# EAGLE board HIH6130_Breakout-Panel-v11 (EAGLE 6.5.0), part 1 of 2
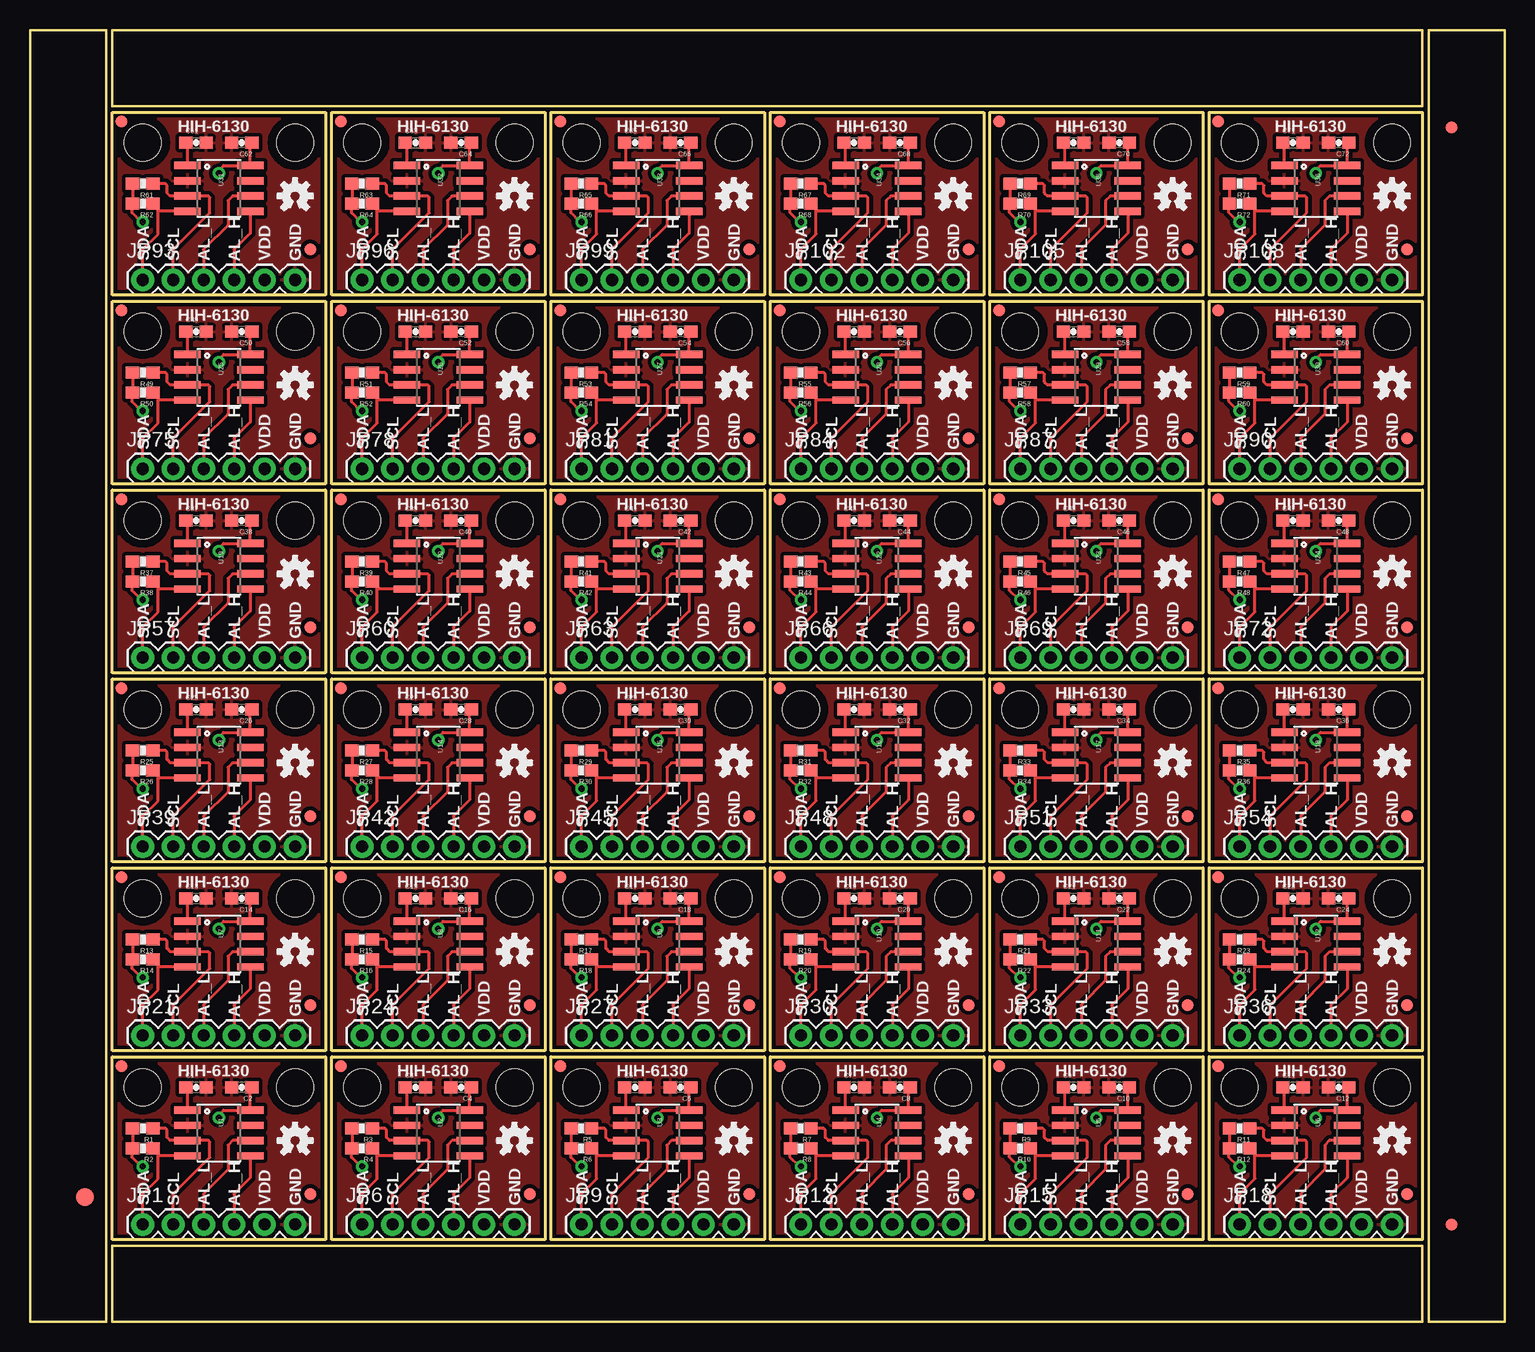
[diagram p0: board, top side]
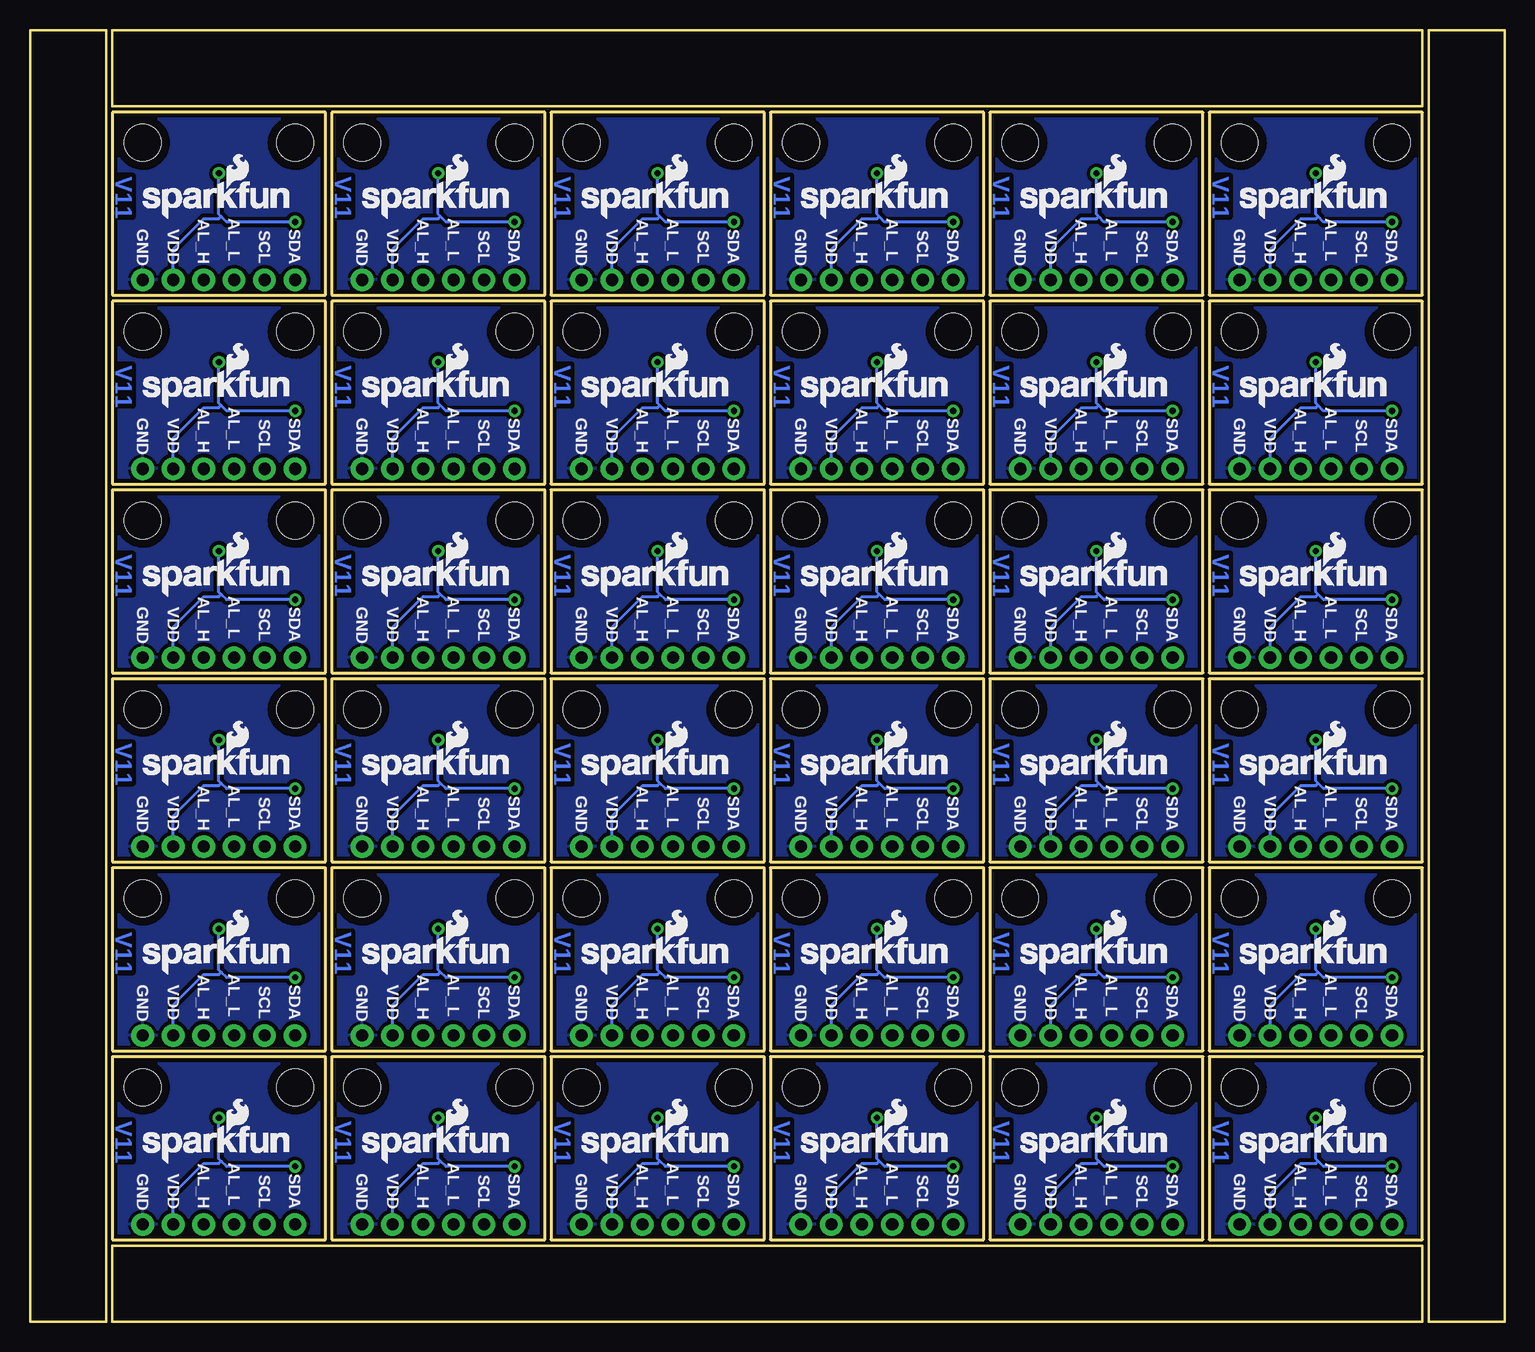
[diagram p1: board, bottom side, seen from below]

Size 122.94 x 107.7 mm. Coordinates in mm from the lower left corner, seen from the top.
Outline: 164 segments
Copper layers (1*16): Top 0.035mm / dielectric 1.5mm / Bottom 0.035mm
Design rules "SparkFun": minimum track width 8mil, minimum drill 20mil, track to track 8mil, track to pad 8mil, pad to pad 8mil, via to via 8mil, smd to smd 8mil, copper to edge 8mil, drill to drill 8mil, minimum pad ring 12mil, minimum via ring 10mil, stop-mask expansion 4mil, vias tented up to drill 20mil, thermal gap 10mil
Net classes: 0 Default: width 0.203 mm; 1 vcc: width 0.254 mm; 2 GND: width 0.813 mm

## Footprints (pad centres in the part's own frame; a part is rotated, then mirrored left to right if it is on the bottom)
0603-CAP = smd 1.1 x 1: 1 -0.85,0; 2 0.85,0
FIDUCIAL-1.5X3 = smd 1.5 x 1.5: 1 0,0
FIDUCIAL-1X2 = smd 1 x 1: 1 0,0
1X06 = drill 1.016 pad 1.88: 1 0,0; 2 2.54,0; 3 5.08,0; 4 7.62,0; 5 10.16,0; 6 12.7,0
STAND-OFF-TIGHT = hole 3.048: 0,0
0603-RES = smd 1.1 x 1: 1 -0.85,0; 2 0.85,0
SOIC8 = smd 0.61 x 2.21: 1 -1.905,-2.616; 2 -0.635,-2.616; 3 0.635,-2.616; 4 1.905,-2.616; 5 1.905,2.616; 6 0.635,2.616; 7 -0.635,2.616; 8 -1.905,2.616

## Placement (x,y rotation side)
C1  0.1uF  [0603-CAP]  13.84,19.56 0 top
C2  0.22uF  [0603-CAP]  17.65,19.56 180 top
C3  0.1uF  [0603-CAP]  32.13,19.56 0 top
C4  0.22uF  [0603-CAP]  35.94,19.56 180 top
C5  0.1uF  [0603-CAP]  50.42,19.56 0 top
C6  0.22uF  [0603-CAP]  54.23,19.56 180 top
C7  0.1uF  [0603-CAP]  68.71,19.56 0 top
C8  0.22uF  [0603-CAP]  72.52,19.56 180 top
C9  0.1uF  [0603-CAP]  87,19.56 0 top
C10  0.22uF  [0603-CAP]  90.81,19.56 180 top
C11  0.1uF  [0603-CAP]  105.28,19.56 0 top
C12  0.22uF  [0603-CAP]  109.09,19.56 180 top
C13  0.1uF  [0603-CAP]  13.84,35.31 0 top
C14  0.22uF  [0603-CAP]  17.65,35.31 180 top
C15  0.1uF  [0603-CAP]  32.13,35.31 0 top
C16  0.22uF  [0603-CAP]  35.94,35.31 180 top
C17  0.1uF  [0603-CAP]  50.42,35.31 0 top
C18  0.22uF  [0603-CAP]  54.23,35.31 180 top
C19  0.1uF  [0603-CAP]  68.71,35.31 0 top
C20  0.22uF  [0603-CAP]  72.52,35.31 180 top
C21  0.1uF  [0603-CAP]  87,35.31 0 top
C22  0.22uF  [0603-CAP]  90.81,35.31 180 top
C23  0.1uF  [0603-CAP]  105.28,35.31 0 top
C24  0.22uF  [0603-CAP]  109.09,35.31 180 top
C25  0.1uF  [0603-CAP]  13.84,51.05 0 top
C26  0.22uF  [0603-CAP]  17.65,51.05 180 top
C27  0.1uF  [0603-CAP]  32.13,51.05 0 top
C28  0.22uF  [0603-CAP]  35.94,51.05 180 top
C29  0.1uF  [0603-CAP]  50.42,51.05 0 top
C30  0.22uF  [0603-CAP]  54.23,51.05 180 top
C31  0.1uF  [0603-CAP]  68.71,51.05 0 top
C32  0.22uF  [0603-CAP]  72.52,51.05 180 top
C33  0.1uF  [0603-CAP]  87,51.05 0 top
C34  0.22uF  [0603-CAP]  90.81,51.05 180 top
C35  0.1uF  [0603-CAP]  105.28,51.05 0 top
C36  0.22uF  [0603-CAP]  109.09,51.05 180 top
C37  0.1uF  [0603-CAP]  13.84,66.8 0 top
C38  0.22uF  [0603-CAP]  17.65,66.8 180 top
C39  0.1uF  [0603-CAP]  32.13,66.8 0 top
C40  0.22uF  [0603-CAP]  35.94,66.8 180 top
C41  0.1uF  [0603-CAP]  50.42,66.8 0 top
C42  0.22uF  [0603-CAP]  54.23,66.8 180 top
C43  0.1uF  [0603-CAP]  68.71,66.8 0 top
C44  0.22uF  [0603-CAP]  72.52,66.8 180 top
C45  0.1uF  [0603-CAP]  87,66.8 0 top
C46  0.22uF  [0603-CAP]  90.81,66.8 180 top
C47  0.1uF  [0603-CAP]  105.28,66.8 0 top
C48  0.22uF  [0603-CAP]  109.09,66.8 180 top
C49  0.1uF  [0603-CAP]  13.84,82.55 0 top
C50  0.22uF  [0603-CAP]  17.65,82.55 180 top
C51  0.1uF  [0603-CAP]  32.13,82.55 0 top
C52  0.22uF  [0603-CAP]  35.94,82.55 180 top
C53  0.1uF  [0603-CAP]  50.42,82.55 0 top
C54  0.22uF  [0603-CAP]  54.23,82.55 180 top
C55  0.1uF  [0603-CAP]  68.71,82.55 0 top
C56  0.22uF  [0603-CAP]  72.52,82.55 180 top
C57  0.1uF  [0603-CAP]  87,82.55 0 top
C58  0.22uF  [0603-CAP]  90.81,82.55 180 top
C59  0.1uF  [0603-CAP]  105.28,82.55 0 top
C60  0.22uF  [0603-CAP]  109.09,82.55 180 top
C61  0.1uF  [0603-CAP]  13.84,98.3 0 top
C62  0.22uF  [0603-CAP]  17.65,98.3 180 top
C63  0.1uF  [0603-CAP]  32.13,98.3 0 top
C64  0.22uF  [0603-CAP]  35.94,98.3 180 top
C65  0.1uF  [0603-CAP]  50.42,98.3 0 top
C66  0.22uF  [0603-CAP]  54.23,98.3 180 top
C67  0.1uF  [0603-CAP]  68.71,98.3 0 top
C68  0.22uF  [0603-CAP]  72.52,98.3 180 top
C69  0.1uF  [0603-CAP]  87,98.3 0 top
C70  0.22uF  [0603-CAP]  90.81,98.3 180 top
C71  0.1uF  [0603-CAP]  105.28,98.3 0 top
C72  0.22uF  [0603-CAP]  109.09,98.3 180 top
E$1  [FIDUCIAL-1.5X3]  4.57,10.41 0 top
E$4  [FIDUCIAL-1X2]  118.49,8.13 0 top
E$6  [FIDUCIAL-1X2]  118.49,99.57 180 top
FID1  FIDUCIAL1X2  [FIDUCIAL-1X2]  7.62,21.34 0 top
FID2  FIDUCIAL1X2  [FIDUCIAL-1X2]  23.37,10.67 0 top
FID3  FIDUCIAL1X2  [FIDUCIAL-1X2]  25.91,21.34 0 top
FID4  FIDUCIAL1X2  [FIDUCIAL-1X2]  41.66,10.67 0 top
FID5  FIDUCIAL1X2  [FIDUCIAL-1X2]  44.2,21.34 0 top
FID6  FIDUCIAL1X2  [FIDUCIAL-1X2]  59.94,10.67 0 top
FID7  FIDUCIAL1X2  [FIDUCIAL-1X2]  62.48,21.34 0 top
FID8  FIDUCIAL1X2  [FIDUCIAL-1X2]  78.23,10.67 0 top
FID9  FIDUCIAL1X2  [FIDUCIAL-1X2]  80.77,21.34 0 top
FID10  FIDUCIAL1X2  [FIDUCIAL-1X2]  96.52,10.67 0 top
FID11  FIDUCIAL1X2  [FIDUCIAL-1X2]  99.06,21.34 0 top
FID12  FIDUCIAL1X2  [FIDUCIAL-1X2]  114.81,10.67 0 top
FID13  FIDUCIAL1X2  [FIDUCIAL-1X2]  7.62,37.08 0 top
FID14  FIDUCIAL1X2  [FIDUCIAL-1X2]  23.37,26.42 0 top
FID15  FIDUCIAL1X2  [FIDUCIAL-1X2]  25.91,37.08 0 top
FID16  FIDUCIAL1X2  [FIDUCIAL-1X2]  41.66,26.42 0 top
FID17  FIDUCIAL1X2  [FIDUCIAL-1X2]  44.2,37.08 0 top
FID18  FIDUCIAL1X2  [FIDUCIAL-1X2]  59.94,26.42 0 top
FID19  FIDUCIAL1X2  [FIDUCIAL-1X2]  62.48,37.08 0 top
FID20  FIDUCIAL1X2  [FIDUCIAL-1X2]  78.23,26.42 0 top
FID21  FIDUCIAL1X2  [FIDUCIAL-1X2]  80.77,37.08 0 top
FID22  FIDUCIAL1X2  [FIDUCIAL-1X2]  96.52,26.42 0 top
FID23  FIDUCIAL1X2  [FIDUCIAL-1X2]  99.06,37.08 0 top
FID24  FIDUCIAL1X2  [FIDUCIAL-1X2]  114.81,26.42 0 top
FID25  FIDUCIAL1X2  [FIDUCIAL-1X2]  7.62,52.83 0 top
FID26  FIDUCIAL1X2  [FIDUCIAL-1X2]  23.37,42.16 0 top
FID27  FIDUCIAL1X2  [FIDUCIAL-1X2]  25.91,52.83 0 top
FID28  FIDUCIAL1X2  [FIDUCIAL-1X2]  41.66,42.16 0 top
FID29  FIDUCIAL1X2  [FIDUCIAL-1X2]  44.2,52.83 0 top
FID30  FIDUCIAL1X2  [FIDUCIAL-1X2]  59.94,42.16 0 top
FID31  FIDUCIAL1X2  [FIDUCIAL-1X2]  62.48,52.83 0 top
FID32  FIDUCIAL1X2  [FIDUCIAL-1X2]  78.23,42.16 0 top
FID33  FIDUCIAL1X2  [FIDUCIAL-1X2]  80.77,52.83 0 top
FID34  FIDUCIAL1X2  [FIDUCIAL-1X2]  96.52,42.16 0 top
FID35  FIDUCIAL1X2  [FIDUCIAL-1X2]  99.06,52.83 0 top
FID36  FIDUCIAL1X2  [FIDUCIAL-1X2]  114.81,42.16 0 top
FID37  FIDUCIAL1X2  [FIDUCIAL-1X2]  7.62,68.58 0 top
FID38  FIDUCIAL1X2  [FIDUCIAL-1X2]  23.37,57.91 0 top
FID39  FIDUCIAL1X2  [FIDUCIAL-1X2]  25.91,68.58 0 top
FID40  FIDUCIAL1X2  [FIDUCIAL-1X2]  41.66,57.91 0 top
FID41  FIDUCIAL1X2  [FIDUCIAL-1X2]  44.2,68.58 0 top
FID42  FIDUCIAL1X2  [FIDUCIAL-1X2]  59.94,57.91 0 top
FID43  FIDUCIAL1X2  [FIDUCIAL-1X2]  62.48,68.58 0 top
FID44  FIDUCIAL1X2  [FIDUCIAL-1X2]  78.23,57.91 0 top
FID45  FIDUCIAL1X2  [FIDUCIAL-1X2]  80.77,68.58 0 top
FID46  FIDUCIAL1X2  [FIDUCIAL-1X2]  96.52,57.91 0 top
FID47  FIDUCIAL1X2  [FIDUCIAL-1X2]  99.06,68.58 0 top
FID48  FIDUCIAL1X2  [FIDUCIAL-1X2]  114.81,57.91 0 top
FID49  FIDUCIAL1X2  [FIDUCIAL-1X2]  7.62,84.33 0 top
FID50  FIDUCIAL1X2  [FIDUCIAL-1X2]  23.37,73.66 0 top
FID51  FIDUCIAL1X2  [FIDUCIAL-1X2]  25.91,84.33 0 top
FID52  FIDUCIAL1X2  [FIDUCIAL-1X2]  41.66,73.66 0 top
FID53  FIDUCIAL1X2  [FIDUCIAL-1X2]  44.2,84.33 0 top
FID54  FIDUCIAL1X2  [FIDUCIAL-1X2]  59.94,73.66 0 top
FID55  FIDUCIAL1X2  [FIDUCIAL-1X2]  62.48,84.33 0 top
FID56  FIDUCIAL1X2  [FIDUCIAL-1X2]  78.23,73.66 0 top
FID57  FIDUCIAL1X2  [FIDUCIAL-1X2]  80.77,84.33 0 top
FID58  FIDUCIAL1X2  [FIDUCIAL-1X2]  96.52,73.66 0 top
FID59  FIDUCIAL1X2  [FIDUCIAL-1X2]  99.06,84.33 0 top
FID60  FIDUCIAL1X2  [FIDUCIAL-1X2]  114.81,73.66 0 top
FID61  FIDUCIAL1X2  [FIDUCIAL-1X2]  7.62,100.08 0 top
FID62  FIDUCIAL1X2  [FIDUCIAL-1X2]  23.37,89.41 0 top
FID63  FIDUCIAL1X2  [FIDUCIAL-1X2]  25.91,100.08 0 top
FID64  FIDUCIAL1X2  [FIDUCIAL-1X2]  41.66,89.41 0 top
FID65  FIDUCIAL1X2  [FIDUCIAL-1X2]  44.2,100.08 0 top
FID66  FIDUCIAL1X2  [FIDUCIAL-1X2]  59.94,89.41 0 top
FID67  FIDUCIAL1X2  [FIDUCIAL-1X2]  62.48,100.08 0 top
FID68  FIDUCIAL1X2  [FIDUCIAL-1X2]  78.23,89.41 0 top
FID69  FIDUCIAL1X2  [FIDUCIAL-1X2]  80.77,100.08 0 top
FID70  FIDUCIAL1X2  [FIDUCIAL-1X2]  96.52,89.41 0 top
FID71  FIDUCIAL1X2  [FIDUCIAL-1X2]  99.06,100.08 0 top
FID72  FIDUCIAL1X2  [FIDUCIAL-1X2]  114.81,89.41 0 top
JP1  [1X06]  9.4,8.13 0 top
JP2  STAND-OFFTIGHT  [STAND-OFF-TIGHT]  27.69,19.56 0 top
JP3  STAND-OFFTIGHT  [STAND-OFF-TIGHT]  9.4,19.56 0 top
JP4  STAND-OFFTIGHT  [STAND-OFF-TIGHT]  22.1,19.56 0 top
JP5  STAND-OFFTIGHT  [STAND-OFF-TIGHT]  40.39,19.56 0 top
JP6  [1X06]  27.69,8.13 0 top
JP7  STAND-OFFTIGHT  [STAND-OFF-TIGHT]  45.97,19.56 0 top
JP8  STAND-OFFTIGHT  [STAND-OFF-TIGHT]  58.67,19.56 0 top
JP9  [1X06]  45.97,8.13 0 top
JP10  STAND-OFFTIGHT  [STAND-OFF-TIGHT]  64.26,19.56 0 top
JP11  STAND-OFFTIGHT  [STAND-OFF-TIGHT]  76.96,19.56 0 top
JP12  [1X06]  64.26,8.13 0 top
JP13  STAND-OFFTIGHT  [STAND-OFF-TIGHT]  82.55,19.56 0 top
JP14  STAND-OFFTIGHT  [STAND-OFF-TIGHT]  95.25,19.56 0 top
JP15  [1X06]  82.55,8.13 0 top
JP16  STAND-OFFTIGHT  [STAND-OFF-TIGHT]  100.84,19.56 0 top
JP17  STAND-OFFTIGHT  [STAND-OFF-TIGHT]  113.54,19.56 0 top
JP18  [1X06]  100.84,8.13 0 top
JP19  STAND-OFFTIGHT  [STAND-OFF-TIGHT]  9.4,35.31 0 top
JP20  STAND-OFFTIGHT  [STAND-OFF-TIGHT]  22.1,35.31 0 top
JP21  [1X06]  9.4,23.88 0 top
JP22  STAND-OFFTIGHT  [STAND-OFF-TIGHT]  27.69,35.31 0 top
JP23  STAND-OFFTIGHT  [STAND-OFF-TIGHT]  40.39,35.31 0 top
JP24  [1X06]  27.69,23.88 0 top
JP25  STAND-OFFTIGHT  [STAND-OFF-TIGHT]  45.97,35.31 0 top
JP26  STAND-OFFTIGHT  [STAND-OFF-TIGHT]  58.67,35.31 0 top
JP27  [1X06]  45.97,23.88 0 top
JP28  STAND-OFFTIGHT  [STAND-OFF-TIGHT]  64.26,35.31 0 top
JP29  STAND-OFFTIGHT  [STAND-OFF-TIGHT]  76.96,35.31 0 top
JP30  [1X06]  64.26,23.88 0 top
JP31  STAND-OFFTIGHT  [STAND-OFF-TIGHT]  82.55,35.31 0 top
JP32  STAND-OFFTIGHT  [STAND-OFF-TIGHT]  95.25,35.31 0 top
JP33  [1X06]  82.55,23.88 0 top
JP34  STAND-OFFTIGHT  [STAND-OFF-TIGHT]  100.84,35.31 0 top
JP35  STAND-OFFTIGHT  [STAND-OFF-TIGHT]  113.54,35.31 0 top
JP36  [1X06]  100.84,23.88 0 top
JP37  STAND-OFFTIGHT  [STAND-OFF-TIGHT]  9.4,51.05 0 top
JP38  STAND-OFFTIGHT  [STAND-OFF-TIGHT]  22.1,51.05 0 top
JP39  [1X06]  9.4,39.62 0 top
JP40  STAND-OFFTIGHT  [STAND-OFF-TIGHT]  27.69,51.05 0 top
JP41  STAND-OFFTIGHT  [STAND-OFF-TIGHT]  40.39,51.05 0 top
JP42  [1X06]  27.69,39.62 0 top
JP43  STAND-OFFTIGHT  [STAND-OFF-TIGHT]  45.97,51.05 0 top
JP44  STAND-OFFTIGHT  [STAND-OFF-TIGHT]  58.67,51.05 0 top
JP45  [1X06]  45.97,39.62 0 top
JP46  STAND-OFFTIGHT  [STAND-OFF-TIGHT]  64.26,51.05 0 top
JP47  STAND-OFFTIGHT  [STAND-OFF-TIGHT]  76.96,51.05 0 top
JP48  [1X06]  64.26,39.62 0 top
JP49  STAND-OFFTIGHT  [STAND-OFF-TIGHT]  82.55,51.05 0 top
JP50  STAND-OFFTIGHT  [STAND-OFF-TIGHT]  95.25,51.05 0 top
JP51  [1X06]  82.55,39.62 0 top
JP52  STAND-OFFTIGHT  [STAND-OFF-TIGHT]  100.84,51.05 0 top
JP53  STAND-OFFTIGHT  [STAND-OFF-TIGHT]  113.54,51.05 0 top
JP54  [1X06]  100.84,39.62 0 top
JP55  STAND-OFFTIGHT  [STAND-OFF-TIGHT]  9.4,66.8 0 top
JP56  STAND-OFFTIGHT  [STAND-OFF-TIGHT]  22.1,66.8 0 top
JP57  [1X06]  9.4,55.37 0 top
JP58  STAND-OFFTIGHT  [STAND-OFF-TIGHT]  27.69,66.8 0 top
JP59  STAND-OFFTIGHT  [STAND-OFF-TIGHT]  40.39,66.8 0 top
JP60  [1X06]  27.69,55.37 0 top
JP61  STAND-OFFTIGHT  [STAND-OFF-TIGHT]  45.97,66.8 0 top
JP62  STAND-OFFTIGHT  [STAND-OFF-TIGHT]  58.67,66.8 0 top
JP63  [1X06]  45.97,55.37 0 top
JP64  STAND-OFFTIGHT  [STAND-OFF-TIGHT]  64.26,66.8 0 top
JP65  STAND-OFFTIGHT  [STAND-OFF-TIGHT]  76.96,66.8 0 top
JP66  [1X06]  64.26,55.37 0 top
JP67  STAND-OFFTIGHT  [STAND-OFF-TIGHT]  82.55,66.8 0 top
JP68  STAND-OFFTIGHT  [STAND-OFF-TIGHT]  95.25,66.8 0 top
JP69  [1X06]  82.55,55.37 0 top
JP70  STAND-OFFTIGHT  [STAND-OFF-TIGHT]  100.84,66.8 0 top
JP71  STAND-OFFTIGHT  [STAND-OFF-TIGHT]  113.54,66.8 0 top
JP72  [1X06]  100.84,55.37 0 top
JP73  STAND-OFFTIGHT  [STAND-OFF-TIGHT]  9.4,82.55 0 top
JP74  STAND-OFFTIGHT  [STAND-OFF-TIGHT]  22.1,82.55 0 top
JP75  [1X06]  9.4,71.12 0 top
JP76  STAND-OFFTIGHT  [STAND-OFF-TIGHT]  27.69,82.55 0 top
JP77  STAND-OFFTIGHT  [STAND-OFF-TIGHT]  40.39,82.55 0 top
JP78  [1X06]  27.69,71.12 0 top
JP79  STAND-OFFTIGHT  [STAND-OFF-TIGHT]  45.97,82.55 0 top
JP80  STAND-OFFTIGHT  [STAND-OFF-TIGHT]  58.67,82.55 0 top
JP81  [1X06]  45.97,71.12 0 top
JP82  STAND-OFFTIGHT  [STAND-OFF-TIGHT]  64.26,82.55 0 top
JP83  STAND-OFFTIGHT  [STAND-OFF-TIGHT]  76.96,82.55 0 top
JP84  [1X06]  64.26,71.12 0 top
JP85  STAND-OFFTIGHT  [STAND-OFF-TIGHT]  82.55,82.55 0 top
JP86  STAND-OFFTIGHT  [STAND-OFF-TIGHT]  95.25,82.55 0 top
JP87  [1X06]  82.55,71.12 0 top
JP88  STAND-OFFTIGHT  [STAND-OFF-TIGHT]  100.84,82.55 0 top
JP89  STAND-OFFTIGHT  [STAND-OFF-TIGHT]  113.54,82.55 0 top
JP90  [1X06]  100.84,71.12 0 top
JP91  STAND-OFFTIGHT  [STAND-OFF-TIGHT]  9.4,98.3 0 top
JP92  STAND-OFFTIGHT  [STAND-OFF-TIGHT]  22.1,98.3 0 top
JP93  [1X06]  9.4,86.87 0 top
JP94  STAND-OFFTIGHT  [STAND-OFF-TIGHT]  27.69,98.3 0 top
JP95  STAND-OFFTIGHT  [STAND-OFF-TIGHT]  40.39,98.3 0 top
JP96  [1X06]  27.69,86.87 0 top
JP97  STAND-OFFTIGHT  [STAND-OFF-TIGHT]  45.97,98.3 0 top
JP98  STAND-OFFTIGHT  [STAND-OFF-TIGHT]  58.67,98.3 0 top
JP99  [1X06]  45.97,86.87 0 top
JP100  STAND-OFFTIGHT  [STAND-OFF-TIGHT]  64.26,98.3 0 top
JP101  STAND-OFFTIGHT  [STAND-OFF-TIGHT]  76.96,98.3 0 top
JP102  [1X06]  64.26,86.87 0 top
JP103  STAND-OFFTIGHT  [STAND-OFF-TIGHT]  82.55,98.3 0 top
JP104  STAND-OFFTIGHT  [STAND-OFF-TIGHT]  95.25,98.3 0 top
JP105  [1X06]  82.55,86.87 0 top
JP106  STAND-OFFTIGHT  [STAND-OFF-TIGHT]  100.84,98.3 0 top
JP107  STAND-OFFTIGHT  [STAND-OFF-TIGHT]  113.54,98.3 0 top
JP108  [1X06]  100.84,86.87 0 top
R1  2.2k  [0603-RES]  9.4,16.13 180 top
R2  2.2k  [0603-RES]  9.4,14.48 180 top
R3  2.2k  [0603-RES]  27.69,16.13 180 top
R4  2.2k  [0603-RES]  27.69,14.48 180 top
R5  2.2k  [0603-RES]  45.97,16.13 180 top
R6  2.2k  [0603-RES]  45.97,14.48 180 top
R7  2.2k  [0603-RES]  64.26,16.13 180 top
R8  2.2k  [0603-RES]  64.26,14.48 180 top
R9  2.2k  [0603-RES]  82.55,16.13 180 top
R10  2.2k  [0603-RES]  82.55,14.48 180 top
R11  2.2k  [0603-RES]  100.84,16.13 180 top
R12  2.2k  [0603-RES]  100.84,14.48 180 top
R13  2.2k  [0603-RES]  9.4,31.88 180 top
R14  2.2k  [0603-RES]  9.4,30.23 180 top
R15  2.2k  [0603-RES]  27.69,31.88 180 top
R16  2.2k  [0603-RES]  27.69,30.23 180 top
R17  2.2k  [0603-RES]  45.97,31.88 180 top
R18  2.2k  [0603-RES]  45.97,30.23 180 top
R19  2.2k  [0603-RES]  64.26,31.88 180 top
R20  2.2k  [0603-RES]  64.26,30.23 180 top
R21  2.2k  [0603-RES]  82.55,31.88 180 top
R22  2.2k  [0603-RES]  82.55,30.23 180 top
R23  2.2k  [0603-RES]  100.84,31.88 180 top
R24  2.2k  [0603-RES]  100.84,30.23 180 top
R25  2.2k  [0603-RES]  9.4,47.62 180 top
R26  2.2k  [0603-RES]  9.4,45.97 180 top
R27  2.2k  [0603-RES]  27.69,47.62 180 top
R28  2.2k  [0603-RES]  27.69,45.97 180 top
R29  2.2k  [0603-RES]  45.97,47.62 180 top
R30  2.2k  [0603-RES]  45.97,45.97 180 top
R31  2.2k  [0603-RES]  64.26,47.62 180 top
R32  2.2k  [0603-RES]  64.26,45.97 180 top
R33  2.2k  [0603-RES]  82.55,47.62 180 top
R34  2.2k  [0603-RES]  82.55,45.97 180 top
R35  2.2k  [0603-RES]  100.84,47.62 180 top
R36  2.2k  [0603-RES]  100.84,45.97 180 top
R37  2.2k  [0603-RES]  9.4,63.37 180 top
R38  2.2k  [0603-RES]  9.4,61.72 180 top
R39  2.2k  [0603-RES]  27.69,63.37 180 top
R40  2.2k  [0603-RES]  27.69,61.72 180 top
R41  2.2k  [0603-RES]  45.97,63.37 180 top
R42  2.2k  [0603-RES]  45.97,61.72 180 top
R43  2.2k  [0603-RES]  64.26,63.37 180 top
R44  2.2k  [0603-RES]  64.26,61.72 180 top
R45  2.2k  [0603-RES]  82.55,63.37 180 top
R46  2.2k  [0603-RES]  82.55,61.72 180 top
R47  2.2k  [0603-RES]  100.84,63.37 180 top
R48  2.2k  [0603-RES]  100.84,61.72 180 top
R49  2.2k  [0603-RES]  9.4,79.12 180 top
R50  2.2k  [0603-RES]  9.4,77.47 180 top
R51  2.2k  [0603-RES]  27.69,79.12 180 top
R52  2.2k  [0603-RES]  27.69,77.47 180 top
R53  2.2k  [0603-RES]  45.97,79.12 180 top
R54  2.2k  [0603-RES]  45.97,77.47 180 top
R55  2.2k  [0603-RES]  64.26,79.12 180 top
R56  2.2k  [0603-RES]  64.26,77.47 180 top
R57  2.2k  [0603-RES]  82.55,79.12 180 top
R58  2.2k  [0603-RES]  82.55,77.47 180 top
R59  2.2k  [0603-RES]  100.84,79.12 180 top
R60  2.2k  [0603-RES]  100.84,77.47 180 top
R61  2.2k  [0603-RES]  9.4,94.87 180 top
R62  2.2k  [0603-RES]  9.4,93.22 180 top
R63  2.2k  [0603-RES]  27.69,94.87 180 top
R64  2.2k  [0603-RES]  27.69,93.22 180 top
R65  2.2k  [0603-RES]  45.97,94.87 180 top
R66  2.2k  [0603-RES]  45.97,93.22 180 top
R67  2.2k  [0603-RES]  64.26,94.87 180 top
R68  2.2k  [0603-RES]  64.26,93.22 180 top
R69  2.2k  [0603-RES]  82.55,94.87 180 top
R70  2.2k  [0603-RES]  82.55,93.22 180 top
R71  2.2k  [0603-RES]  100.84,94.87 180 top
R72  2.2k  [0603-RES]  100.84,93.22 180 top
U1  HIH6131  [SOIC8]  15.75,15.75 270 top
U2  HIH6131  [SOIC8]  34.04,15.75 270 top
U3  HIH6131  [SOIC8]  52.32,15.75 270 top
U4  HIH6131  [SOIC8]  70.61,15.75 270 top
U5  HIH6131  [SOIC8]  88.9,15.75 270 top
U6  HIH6131  [SOIC8]  107.19,15.75 270 top
U7  HIH6131  [SOIC8]  15.75,31.5 270 top
U8  HIH6131  [SOIC8]  34.04,31.5 270 top
U9  HIH6131  [SOIC8]  52.32,31.5 270 top
U10  HIH6131  [SOIC8]  70.61,31.5 270 top
U11  HIH6131  [SOIC8]  88.9,31.5 270 top
U12  HIH6131  [SOIC8]  107.19,31.5 270 top
U13  HIH6131  [SOIC8]  15.75,47.24 270 top
U14  HIH6131  [SOIC8]  34.04,47.24 270 top
U15  HIH6131  [SOIC8]  52.32,47.24 270 top
U16  HIH6131  [SOIC8]  70.61,47.24 270 top
U17  HIH6131  [SOIC8]  88.9,47.24 270 top
U18  HIH6131  [SOIC8]  107.19,47.24 270 top
U19  HIH6131  [SOIC8]  15.75,62.99 270 top
U20  HIH6131  [SOIC8]  34.04,62.99 270 top
U21  HIH6131  [SOIC8]  52.32,62.99 270 top
U22  HIH6131  [SOIC8]  70.61,62.99 270 top
U23  HIH6131  [SOIC8]  88.9,62.99 270 top
U24  HIH6131  [SOIC8]  107.19,62.99 270 top
U25  HIH6131  [SOIC8]  15.75,78.74 270 top
U26  HIH6131  [SOIC8]  34.04,78.74 270 top
U27  HIH6131  [SOIC8]  52.32,78.74 270 top
U28  HIH6131  [SOIC8]  70.61,78.74 270 top
U29  HIH6131  [SOIC8]  88.9,78.74 270 top
U30  HIH6131  [SOIC8]  107.19,78.74 270 top
U31  HIH6131  [SOIC8]  15.75,94.49 270 top
U32  HIH6131  [SOIC8]  34.04,94.49 270 top
U33  HIH6131  [SOIC8]  52.32,94.49 270 top
U34  HIH6131  [SOIC8]  70.61,94.49 270 top
U35  HIH6131  [SOIC8]  88.9,94.49 270 top
U36  HIH6131  [SOIC8]  107.19,94.49 270 top
U$1  [SFE-NEW-WEB-SOLDERMASK]  22.1,13.21 0 bottom
U$2  OSHW-LOGOS  [OSHW-LOGO-S]  22.1,15.11 0 top
U$3  [SFE-LOGO-FLAME]  15.11,15.75 0 bottom
U$4  OSHW-LOGOS  [OSHW-LOGO-S]  40.39,15.11 0 top
U$5  [SFE-NEW-WEB-SOLDERMASK]  40.39,13.21 0 bottom
U$6  [SFE-NEW-WEB-SOLDERMASK]  22.1,13.21 0 bottom
U$7  [SFE-NEW-WEB-SOLDERMASK]  22.1,13.21 0 bottom
U$8  [SFE-NEW-WEB]  22.1,13.21 0 bottom
U$9  [SFE-LOGO-FLAME]  33.4,15.75 0 bottom
U$10  [SFE-NEW-WEB-SOLDERMASK]  40.39,13.21 0 bottom
U$11  [SFE-NEW-WEB-SOLDERMASK]  40.39,13.21 0 bottom
U$12  [SFE-NEW-WEB]  40.39,13.21 0 bottom
U$13  OSHW-LOGOS  [OSHW-LOGO-S]  58.67,15.11 0 top
U$14  [SFE-NEW-WEB-SOLDERMASK]  58.67,13.21 0 bottom
U$15  [SFE-LOGO-FLAME]  51.69,15.75 0 bottom
U$16  [SFE-NEW-WEB-SOLDERMASK]  58.67,13.21 0 bottom
U$17  [SFE-NEW-WEB-SOLDERMASK]  58.67,13.21 0 bottom
U$18  [SFE-NEW-WEB]  58.67,13.21 0 bottom
U$19  OSHW-LOGOS  [OSHW-LOGO-S]  76.96,15.11 0 top
U$20  [SFE-NEW-WEB-SOLDERMASK]  76.96,13.21 0 bottom
U$21  [SFE-LOGO-FLAME]  69.98,15.75 0 bottom
U$22  [SFE-NEW-WEB-SOLDERMASK]  76.96,13.21 0 bottom
U$23  [SFE-NEW-WEB-SOLDERMASK]  76.96,13.21 0 bottom
U$24  [SFE-NEW-WEB]  76.96,13.21 0 bottom
U$25  OSHW-LOGOS  [OSHW-LOGO-S]  95.25,15.11 0 top
U$26  [SFE-NEW-WEB-SOLDERMASK]  95.25,13.21 0 bottom
U$27  [SFE-LOGO-FLAME]  88.27,15.75 0 bottom
U$28  [SFE-NEW-WEB-SOLDERMASK]  95.25,13.21 0 bottom
U$29  [SFE-NEW-WEB-SOLDERMASK]  95.25,13.21 0 bottom
U$30  [SFE-NEW-WEB]  95.25,13.21 0 bottom
U$31  OSHW-LOGOS  [OSHW-LOGO-S]  113.54,15.11 0 top
U$32  [SFE-NEW-WEB-SOLDERMASK]  113.54,13.21 0 bottom
U$33  [SFE-LOGO-FLAME]  106.55,15.75 0 bottom
U$34  [SFE-NEW-WEB-SOLDERMASK]  113.54,13.21 0 bottom
U$35  [SFE-NEW-WEB-SOLDERMASK]  113.54,13.21 0 bottom
U$36  [SFE-NEW-WEB]  113.54,13.21 0 bottom
U$37  OSHW-LOGOS  [OSHW-LOGO-S]  22.1,30.86 0 top
U$38  [SFE-NEW-WEB-SOLDERMASK]  22.1,28.96 0 bottom
U$39  [SFE-LOGO-FLAME]  15.11,31.5 0 bottom
U$40  [SFE-NEW-WEB-SOLDERMASK]  22.1,28.96 0 bottom
U$41  [SFE-NEW-WEB-SOLDERMASK]  22.1,28.96 0 bottom
U$42  [SFE-NEW-WEB]  22.1,28.96 0 bottom
U$43  OSHW-LOGOS  [OSHW-LOGO-S]  40.39,30.86 0 top
U$44  [SFE-NEW-WEB-SOLDERMASK]  40.39,28.96 0 bottom
U$45  [SFE-LOGO-FLAME]  33.4,31.5 0 bottom
U$46  [SFE-NEW-WEB-SOLDERMASK]  40.39,28.96 0 bottom
U$47  [SFE-NEW-WEB-SOLDERMASK]  40.39,28.96 0 bottom
U$48  [SFE-NEW-WEB]  40.39,28.96 0 bottom
U$49  OSHW-LOGOS  [OSHW-LOGO-S]  58.67,30.86 0 top
U$50  [SFE-NEW-WEB-SOLDERMASK]  58.67,28.96 0 bottom
U$51  [SFE-LOGO-FLAME]  51.69,31.5 0 bottom
U$52  [SFE-NEW-WEB-SOLDERMASK]  58.67,28.96 0 bottom
U$53  [SFE-NEW-WEB-SOLDERMASK]  58.67,28.96 0 bottom
U$54  [SFE-NEW-WEB]  58.67,28.96 0 bottom
U$55  OSHW-LOGOS  [OSHW-LOGO-S]  76.96,30.86 0 top
U$56  [SFE-NEW-WEB-SOLDERMASK]  76.96,28.96 0 bottom
U$57  [SFE-LOGO-FLAME]  69.98,31.5 0 bottom
U$58  [SFE-NEW-WEB-SOLDERMASK]  76.96,28.96 0 bottom
U$59  [SFE-NEW-WEB-SOLDERMASK]  76.96,28.96 0 bottom
U$60  [SFE-NEW-WEB]  76.96,28.96 0 bottom
U$61  OSHW-LOGOS  [OSHW-LOGO-S]  95.25,30.86 0 top
U$62  [SFE-NEW-WEB-SOLDERMASK]  95.25,28.96 0 bottom
U$63  [SFE-LOGO-FLAME]  88.27,31.5 0 bottom
U$64  [SFE-NEW-WEB-SOLDERMASK]  95.25,28.96 0 bottom
U$65  [SFE-NEW-WEB-SOLDERMASK]  95.25,28.96 0 bottom
U$66  [SFE-NEW-WEB]  95.25,28.96 0 bottom
U$67  OSHW-LOGOS  [OSHW-LOGO-S]  113.54,30.86 0 top
U$68  [SFE-NEW-WEB-SOLDERMASK]  113.54,28.96 0 bottom
U$69  [SFE-LOGO-FLAME]  106.55,31.5 0 bottom
U$70  [SFE-NEW-WEB-SOLDERMASK]  113.54,28.96 0 bottom
U$71  [SFE-NEW-WEB-SOLDERMASK]  113.54,28.96 0 bottom
U$72  [SFE-NEW-WEB]  113.54,28.96 0 bottom
U$73  OSHW-LOGOS  [OSHW-LOGO-S]  22.1,46.61 0 top
U$74  [SFE-NEW-WEB-SOLDERMASK]  22.1,44.7 0 bottom
U$75  [SFE-LOGO-FLAME]  15.11,47.24 0 bottom
U$76  [SFE-NEW-WEB-SOLDERMASK]  22.1,44.7 0 bottom
U$77  [SFE-NEW-WEB-SOLDERMASK]  22.1,44.7 0 bottom
U$78  [SFE-NEW-WEB]  22.1,44.7 0 bottom
U$79  OSHW-LOGOS  [OSHW-LOGO-S]  40.39,46.61 0 top
U$80  [SFE-NEW-WEB-SOLDERMASK]  40.39,44.7 0 bottom
U$81  [SFE-LOGO-FLAME]  33.4,47.24 0 bottom
U$82  [SFE-NEW-WEB-SOLDERMASK]  40.39,44.7 0 bottom
U$83  [SFE-NEW-WEB-SOLDERMASK]  40.39,44.7 0 bottom
U$84  [SFE-NEW-WEB]  40.39,44.7 0 bottom
U$85  OSHW-LOGOS  [OSHW-LOGO-S]  58.67,46.61 0 top
U$86  [SFE-NEW-WEB-SOLDERMASK]  58.67,44.7 0 bottom
U$87  [SFE-LOGO-FLAME]  51.69,47.24 0 bottom
U$88  [SFE-NEW-WEB-SOLDERMASK]  58.67,44.7 0 bottom
U$89  [SFE-NEW-WEB-SOLDERMASK]  58.67,44.7 0 bottom
U$90  [SFE-NEW-WEB]  58.67,44.7 0 bottom
U$91  OSHW-LOGOS  [OSHW-LOGO-S]  76.96,46.61 0 top
U$92  [SFE-NEW-WEB-SOLDERMASK]  76.96,44.7 0 bottom
U$93  [SFE-LOGO-FLAME]  69.98,47.24 0 bottom
U$94  [SFE-NEW-WEB-SOLDERMASK]  76.96,44.7 0 bottom
U$95  [SFE-NEW-WEB-SOLDERMASK]  76.96,44.7 0 bottom
U$96  [SFE-NEW-WEB]  76.96,44.7 0 bottom
U$97  OSHW-LOGOS  [OSHW-LOGO-S]  95.25,46.61 0 top
U$98  [SFE-NEW-WEB-SOLDERMASK]  95.25,44.7 0 bottom
U$99  [SFE-LOGO-FLAME]  88.27,47.24 0 bottom
U$100  [SFE-NEW-WEB-SOLDERMASK]  95.25,44.7 0 bottom
U$101  [SFE-NEW-WEB-SOLDERMASK]  95.25,44.7 0 bottom
U$102  [SFE-NEW-WEB]  95.25,44.7 0 bottom
U$103  OSHW-LOGOS  [OSHW-LOGO-S]  113.54,46.61 0 top
U$104  [SFE-NEW-WEB-SOLDERMASK]  113.54,44.7 0 bottom
U$105  [SFE-LOGO-FLAME]  106.55,47.24 0 bottom
U$106  [SFE-NEW-WEB-SOLDERMASK]  113.54,44.7 0 bottom
U$107  [SFE-NEW-WEB-SOLDERMASK]  113.54,44.7 0 bottom
U$108  [SFE-NEW-WEB]  113.54,44.7 0 bottom
U$109  OSHW-LOGOS  [OSHW-LOGO-S]  22.1,62.36 0 top
U$110  [SFE-NEW-WEB-SOLDERMASK]  22.1,60.45 0 bottom
U$111  [SFE-LOGO-FLAME]  15.11,62.99 0 bottom
U$112  [SFE-NEW-WEB-SOLDERMASK]  22.1,60.45 0 bottom
U$113  [SFE-NEW-WEB-SOLDERMASK]  22.1,60.45 0 bottom
U$114  [SFE-NEW-WEB]  22.1,60.45 0 bottom
U$115  OSHW-LOGOS  [OSHW-LOGO-S]  40.39,62.36 0 top
U$116  [SFE-NEW-WEB-SOLDERMASK]  40.39,60.45 0 bottom
U$117  [SFE-LOGO-FLAME]  33.4,62.99 0 bottom
U$118  [SFE-NEW-WEB-SOLDERMASK]  40.39,60.45 0 bottom
U$119  [SFE-NEW-WEB-SOLDERMASK]  40.39,60.45 0 bottom
U$120  [SFE-NEW-WEB]  40.39,60.45 0 bottom
U$121  OSHW-LOGOS  [OSHW-LOGO-S]  58.67,62.36 0 top
U$122  [SFE-NEW-WEB-SOLDERMASK]  58.67,60.45 0 bottom
U$123  [SFE-LOGO-FLAME]  51.69,62.99 0 bottom
U$124  [SFE-NEW-WEB-SOLDERMASK]  58.67,60.45 0 bottom
U$125  [SFE-NEW-WEB-SOLDERMASK]  58.67,60.45 0 bottom
U$126  [SFE-NEW-WEB]  58.67,60.45 0 bottom
U$127  OSHW-LOGOS  [OSHW-LOGO-S]  76.96,62.36 0 top
U$128  [SFE-NEW-WEB-SOLDERMASK]  76.96,60.45 0 bottom
U$129  [SFE-LOGO-FLAME]  69.98,62.99 0 bottom
U$130  [SFE-NEW-WEB-SOLDERMASK]  76.96,60.45 0 bottom
U$131  [SFE-NEW-WEB-SOLDERMASK]  76.96,60.45 0 bottom
U$132  [SFE-NEW-WEB]  76.96,60.45 0 bottom
U$133  OSHW-LOGOS  [OSHW-LOGO-S]  95.25,62.36 0 top
U$134  [SFE-NEW-WEB-SOLDERMASK]  95.25,60.45 0 bottom
U$135  [SFE-LOGO-FLAME]  88.27,62.99 0 bottom
U$136  [SFE-NEW-WEB-SOLDERMASK]  95.25,60.45 0 bottom
U$137  [SFE-NEW-WEB-SOLDERMASK]  95.25,60.45 0 bottom
U$138  [SFE-NEW-WEB]  95.25,60.45 0 bottom
U$139  OSHW-LOGOS  [OSHW-LOGO-S]  113.54,62.36 0 top
U$140  [SFE-NEW-WEB-SOLDERMASK]  113.54,60.45 0 bottom
U$141  [SFE-LOGO-FLAME]  106.55,62.99 0 bottom
U$142  [SFE-NEW-WEB-SOLDERMASK]  113.54,60.45 0 bottom
U$143  [SFE-NEW-WEB-SOLDERMASK]  113.54,60.45 0 bottom
U$144  [SFE-NEW-WEB]  113.54,60.45 0 bottom
U$145  OSHW-LOGOS  [OSHW-LOGO-S]  22.1,78.11 0 top
U$146  [SFE-NEW-WEB-SOLDERMASK]  22.1,76.2 0 bottom
U$147  [SFE-LOGO-FLAME]  15.11,78.74 0 bottom
U$148  [SFE-NEW-WEB-SOLDERMASK]  22.1,76.2 0 bottom
U$149  [SFE-NEW-WEB-SOLDERMASK]  22.1,76.2 0 bottom
U$150  [SFE-NEW-WEB]  22.1,76.2 0 bottom
U$151  OSHW-LOGOS  [OSHW-LOGO-S]  40.39,78.11 0 top
U$152  [SFE-NEW-WEB-SOLDERMASK]  40.39,76.2 0 bottom
U$153  [SFE-LOGO-FLAME]  33.4,78.74 0 bottom
U$154  [SFE-NEW-WEB-SOLDERMASK]  40.39,76.2 0 bottom
U$155  [SFE-NEW-WEB-SOLDERMASK]  40.39,76.2 0 bottom
U$156  [SFE-NEW-WEB]  40.39,76.2 0 bottom
U$157  OSHW-LOGOS  [OSHW-LOGO-S]  58.67,78.11 0 top
U$158  [SFE-NEW-WEB-SOLDERMASK]  58.67,76.2 0 bottom
U$159  [SFE-LOGO-FLAME]  51.69,78.74 0 bottom
U$160  [SFE-NEW-WEB-SOLDERMASK]  58.67,76.2 0 bottom
U$161  [SFE-NEW-WEB-SOLDERMASK]  58.67,76.2 0 bottom
U$162  [SFE-NEW-WEB]  58.67,76.2 0 bottom
U$163  OSHW-LOGOS  [OSHW-LOGO-S]  76.96,78.11 0 top
U$164  [SFE-NEW-WEB-SOLDERMASK]  76.96,76.2 0 bottom
U$165  [SFE-LOGO-FLAME]  69.98,78.74 0 bottom
U$166  [SFE-NEW-WEB-SOLDERMASK]  76.96,76.2 0 bottom
U$167  [SFE-NEW-WEB-SOLDERMASK]  76.96,76.2 0 bottom
U$168  [SFE-NEW-WEB]  76.96,76.2 0 bottom
U$169  OSHW-LOGOS  [OSHW-LOGO-S]  95.25,78.11 0 top
U$170  [SFE-NEW-WEB-SOLDERMASK]  95.25,76.2 0 bottom
U$171  [SFE-LOGO-FLAME]  88.27,78.74 0 bottom
U$172  [SFE-NEW-WEB-SOLDERMASK]  95.25,76.2 0 bottom
U$173  [SFE-NEW-WEB-SOLDERMASK]  95.25,76.2 0 bottom
U$174  [SFE-NEW-WEB]  95.25,76.2 0 bottom
U$175  OSHW-LOGOS  [OSHW-LOGO-S]  113.54,78.11 0 top
U$176  [SFE-NEW-WEB-SOLDERMASK]  113.54,76.2 0 bottom
U$177  [SFE-LOGO-FLAME]  106.55,78.74 0 bottom
U$178  [SFE-NEW-WEB-SOLDERMASK]  113.54,76.2 0 bottom
U$179  [SFE-NEW-WEB-SOLDERMASK]  113.54,76.2 0 bottom
U$180  [SFE-NEW-WEB]  113.54,76.2 0 bottom
U$181  OSHW-LOGOS  [OSHW-LOGO-S]  22.1,93.85 0 top
U$182  [SFE-NEW-WEB-SOLDERMASK]  22.1,91.95 0 bottom
U$183  [SFE-LOGO-FLAME]  15.11,94.49 0 bottom
U$184  [SFE-NEW-WEB-SOLDERMASK]  22.1,91.95 0 bottom
U$185  [SFE-NEW-WEB-SOLDERMASK]  22.1,91.95 0 bottom
U$186  [SFE-NEW-WEB]  22.1,91.95 0 bottom
U$187  OSHW-LOGOS  [OSHW-LOGO-S]  40.39,93.85 0 top
U$188  [SFE-NEW-WEB-SOLDERMASK]  40.39,91.95 0 bottom
U$189  [SFE-LOGO-FLAME]  33.4,94.49 0 bottom
U$190  [SFE-NEW-WEB-SOLDERMASK]  40.39,91.95 0 bottom
U$191  [SFE-NEW-WEB-SOLDERMASK]  40.39,91.95 0 bottom
U$192  [SFE-NEW-WEB]  40.39,91.95 0 bottom
U$193  OSHW-LOGOS  [OSHW-LOGO-S]  58.67,93.85 0 top
U$194  [SFE-NEW-WEB-SOLDERMASK]  58.67,91.95 0 bottom
U$195  [SFE-LOGO-FLAME]  51.69,94.49 0 bottom
U$196  [SFE-NEW-WEB-SOLDERMASK]  58.67,91.95 0 bottom
U$197  [SFE-NEW-WEB-SOLDERMASK]  58.67,91.95 0 bottom
U$198  [SFE-NEW-WEB]  58.67,91.95 0 bottom
U$199  OSHW-LOGOS  [OSHW-LOGO-S]  76.96,93.85 0 top
U$200  [SFE-NEW-WEB-SOLDERMASK]  76.96,91.95 0 bottom
U$201  [SFE-LOGO-FLAME]  69.98,94.49 0 bottom
U$202  [SFE-NEW-WEB-SOLDERMASK]  76.96,91.95 0 bottom
U$203  [SFE-NEW-WEB-SOLDERMASK]  76.96,91.95 0 bottom
U$204  [SFE-NEW-WEB]  76.96,91.95 0 bottom
U$205  OSHW-LOGOS  [OSHW-LOGO-S]  95.25,93.85 0 top
U$206  [SFE-NEW-WEB-SOLDERMASK]  95.25,91.95 0 bottom
U$207  [SFE-LOGO-FLAME]  88.27,94.49 0 bottom
U$208  [SFE-NEW-WEB-SOLDERMASK]  95.25,91.95 0 bottom
U$209  [SFE-NEW-WEB-SOLDERMASK]  95.25,91.95 0 bottom
U$210  [SFE-NEW-WEB]  95.25,91.95 0 bottom
U$211  OSHW-LOGOS  [OSHW-LOGO-S]  113.54,93.85 0 top
U$212  [SFE-NEW-WEB-SOLDERMASK]  113.54,91.95 0 bottom
U$213  [SFE-LOGO-FLAME]  106.55,94.49 0 bottom
U$214  [SFE-NEW-WEB-SOLDERMASK]  113.54,91.95 0 bottom
U$215  [SFE-NEW-WEB-SOLDERMASK]  113.54,91.95 0 bottom
U$216  [SFE-NEW-WEB]  113.54,91.95 0 bottom

## Library data of the parts
C1 C3 C5 C7 C9 C11 C13 C15 C17 C19 C21 C23 C25 C27 C29 C31 C33 C35 C37 C39 C41 C43 C45 C47 C49 C51 C53 C55 C57 C59 C61 C63 C65 C67 C69 C71 = SparkFun-Capacitors; PROD_ID: CAP-00810
C2 C4 C6 C8 C10 C12 C14 C16 C18 C20 C22 C24 C26 C28 C30 C32 C34 C36 C38 C40 C42 C44 C46 C48 C50 C52 C54 C56 C58 C60 C62 C64 C66 C68 C70 C72 = SparkFun-Capacitors; PROD_ID: CAP-07822
E$1 = SparkFun-Retired
E$4 E$6 FID1-FID72 = SparkFun-Aesthetics
JP1-JP108 U1-U36 U$1-U$216 = SparkFun
R1-R72 = SparkFun-Resistors; PROD_ID: RES-08272

## Nets
AL_H: JP1.4 U1.5
AL_H1: JP6.4 U2.5
AL_H2: JP9.4 U3.5
AL_H3: JP12.4 U4.5
AL_H4: JP15.4 U5.5
AL_H5: JP18.4 U6.5
AL_H6: JP21.4 U7.5
AL_H7: JP24.4 U8.5
AL_H8: JP27.4 U9.5
AL_H9: JP30.4 U10.5
AL_H10: JP33.4 U11.5
AL_H11: JP36.4 U12.5
AL_H12: JP39.4 U13.5
AL_H13: JP42.4 U14.5
AL_H14: JP45.4 U15.5
AL_H15: JP48.4 U16.5
AL_H16: JP51.4 U17.5
AL_H17: JP54.4 U18.5
AL_H18: JP57.4 U19.5
AL_H19: JP60.4 U20.5
AL_H20: JP63.4 U21.5
AL_H21: JP66.4 U22.5
AL_H22: JP69.4 U23.5
AL_H23: JP72.4 U24.5
AL_H24: JP75.4 U25.5
AL_H25: JP78.4 U26.5
AL_H26: JP81.4 U27.5
AL_H27: JP84.4 U28.5
AL_H28: JP87.4 U29.5
AL_H29: JP90.4 U30.5
AL_H30: JP93.4 U31.5
AL_H31: JP96.4 U32.5
AL_H32: JP99.4 U33.5
AL_H33: JP102.4 U34.5
AL_H34: JP105.4 U35.5
AL_H35: JP108.4 U36.5
AL_L: JP1.3 U1.6
AL_L1: JP6.3 U2.6
AL_L2: JP9.3 U3.6
AL_L3: JP12.3 U4.6
AL_L4: JP15.3 U5.6
AL_L5: JP18.3 U6.6
AL_L6: JP21.3 U7.6
AL_L7: JP24.3 U8.6
AL_L8: JP27.3 U9.6
AL_L9: JP30.3 U10.6
AL_L10: JP33.3 U11.6
AL_L11: JP36.3 U12.6
AL_L12: JP39.3 U13.6
AL_L13: JP42.3 U14.6
AL_L14: JP45.3 U15.6
AL_L15: JP48.3 U16.6
AL_L16: JP51.3 U17.6
AL_L17: JP54.3 U18.6
AL_L18: JP57.3 U19.6
AL_L19: JP60.3 U20.6
AL_L20: JP63.3 U21.6
AL_L21: JP66.3 U22.6
AL_L22: JP69.3 U23.6
AL_L23: JP72.3 U24.6
AL_L24: JP75.3 U25.6
AL_L25: JP78.3 U26.6
AL_L26: JP81.3 U27.6
AL_L27: JP84.3 U28.6
AL_L28: JP87.3 U29.6
AL_L29: JP90.3 U30.6
AL_L30: JP93.3 U31.6
AL_L31: JP96.3 U32.6
AL_L32: JP99.3 U33.6
AL_L33: JP102.3 U34.6
AL_L34: JP105.3 U35.6
AL_L35: JP108.3 U36.6
GND: C1.2 C2.2 JP1.6 U1.2
GND1: C3.2 C4.2 JP6.6 U2.2
GND2: C5.2 C6.2 JP9.6 U3.2
GND3: C7.2 C8.2 JP12.6 U4.2
GND4: C9.2 C10.2 JP15.6 U5.2
GND5: C11.2 C12.2 JP18.6 U6.2
GND6: C13.2 C14.2 JP21.6 U7.2
GND7: C15.2 C16.2 JP24.6 U8.2
GND8: C17.2 C18.2 JP27.6 U9.2
GND9: C19.2 C20.2 JP30.6 U10.2
GND10: C21.2 C22.2 JP33.6 U11.2
GND11: C23.2 C24.2 JP36.6 U12.2
GND12: C25.2 C26.2 JP39.6 U13.2
GND13: C27.2 C28.2 JP42.6 U14.2
GND14: C29.2 C30.2 JP45.6 U15.2
GND15: C31.2 C32.2 JP48.6 U16.2
GND16: C33.2 C34.2 JP51.6 U17.2
GND17: C35.2 C36.2 JP54.6 U18.2
GND18: C37.2 C38.2 JP57.6 U19.2
GND19: C39.2 C40.2 JP60.6 U20.2
GND20: C41.2 C42.2 JP63.6 U21.2
GND21: C43.2 C44.2 JP66.6 U22.2
GND22: C45.2 C46.2 JP69.6 U23.2
GND23: C47.2 C48.2 JP72.6 U24.2
GND24: C49.2 C50.2 JP75.6 U25.2
GND25: C51.2 C52.2 JP78.6 U26.2
GND26: C53.2 C54.2 JP81.6 U27.2
GND27: C55.2 C56.2 JP84.6 U28.2
GND28: C57.2 C58.2 JP87.6 U29.2
GND29: C59.2 C60.2 JP90.6 U30.2
GND30: C61.2 C62.2 JP93.6 U31.2
GND31: C63.2 C64.2 JP96.6 U32.2
GND32: C65.2 C66.2 JP99.6 U33.2
GND33: C67.2 C68.2 JP102.6 U34.2
GND34: C69.2 C70.2 JP105.6 U35.2
GND35: C71.2 C72.2 JP108.6 U36.2
N$1: C1.1 U1.1
N$2: C3.1 U2.1
N$3: C5.1 U3.1
N$4: C7.1 U4.1
N$5: C9.1 U5.1
N$6: C11.1 U6.1
N$7: C13.1 U7.1
N$8: C15.1 U8.1
N$9: C17.1 U9.1
N$10: C19.1 U10.1
N$11: C21.1 U11.1
N$12: C23.1 U12.1
N$13: C25.1 U13.1
N$14: C27.1 U14.1
N$15: C29.1 U15.1
N$16: C31.1 U16.1
N$17: C33.1 U17.1
N$18: C35.1 U18.1
N$19: C37.1 U19.1
N$20: C39.1 U20.1
N$21: C41.1 U21.1
N$22: C43.1 U22.1
N$23: C45.1 U23.1
N$24: C47.1 U24.1
N$25: C49.1 U25.1
N$26: C51.1 U26.1
N$27: C53.1 U27.1
N$28: C55.1 U28.1
N$29: C57.1 U29.1
N$30: C59.1 U30.1
N$31: C61.1 U31.1
N$32: C63.1 U32.1
N$33: C65.1 U33.1
N$34: C67.1 U34.1
N$35: C69.1 U35.1
N$36: C71.1 U36.1
SCL: JP1.2 R1.1 U1.3
SCL1: JP6.2 R3.1 U2.3
SCL2: JP9.2 R5.1 U3.3
SCL3: JP12.2 R7.1 U4.3
SCL4: JP15.2 R9.1 U5.3
SCL5: JP18.2 R11.1 U6.3
SCL6: JP21.2 R13.1 U7.3
SCL7: JP24.2 R15.1 U8.3
SCL8: JP27.2 R17.1 U9.3
SCL9: JP30.2 R19.1 U10.3
SCL10: JP33.2 R21.1 U11.3
SCL11: JP36.2 R23.1 U12.3
SCL12: JP39.2 R25.1 U13.3
SCL13: JP42.2 R27.1 U14.3
SCL14: JP45.2 R29.1 U15.3
SCL15: JP48.2 R31.1 U16.3
SCL16: JP51.2 R33.1 U17.3
SCL17: JP54.2 R35.1 U18.3
SCL18: JP57.2 R37.1 U19.3
SCL19: JP60.2 R39.1 U20.3
SCL20: JP63.2 R41.1 U21.3
SCL21: JP66.2 R43.1 U22.3
SCL22: JP69.2 R45.1 U23.3
SCL23: JP72.2 R47.1 U24.3
SCL24: JP75.2 R49.1 U25.3
SCL25: JP78.2 R51.1 U26.3
SCL26: JP81.2 R53.1 U27.3
SCL27: JP84.2 R55.1 U28.3
SCL28: JP87.2 R57.1 U29.3
SCL29: JP90.2 R59.1 U30.3
SCL30: JP93.2 R61.1 U31.3
SCL31: JP96.2 R63.1 U32.3
SCL32: JP99.2 R65.1 U33.3
SCL33: JP102.2 R67.1 U34.3
SCL34: JP105.2 R69.1 U35.3
SCL35: JP108.2 R71.1 U36.3
SDA: JP1.1 R2.1 U1.4
SDA1: JP6.1 R4.1 U2.4
SDA2: JP9.1 R6.1 U3.4
SDA3: JP12.1 R8.1 U4.4
SDA4: JP15.1 R10.1 U5.4
SDA5: JP18.1 R12.1 U6.4
SDA6: JP21.1 R14.1 U7.4
SDA7: JP24.1 R16.1 U8.4
SDA8: JP27.1 R18.1 U9.4
SDA9: JP30.1 R20.1 U10.4
SDA10: JP33.1 R22.1 U11.4
SDA11: JP36.1 R24.1 U12.4
SDA12: JP39.1 R26.1 U13.4
SDA13: JP42.1 R28.1 U14.4
SDA14: JP45.1 R30.1 U15.4
SDA15: JP48.1 R32.1 U16.4
SDA16: JP51.1 R34.1 U17.4
SDA17: JP54.1 R36.1 U18.4
SDA18: JP57.1 R38.1 U19.4
SDA19: JP60.1 R40.1 U20.4
SDA20: JP63.1 R42.1 U21.4
SDA21: JP66.1 R44.1 U22.4
SDA22: JP69.1 R46.1 U23.4
SDA23: JP72.1 R48.1 U24.4
SDA24: JP75.1 R50.1 U25.4
SDA25: JP78.1 R52.1 U26.4
SDA26: JP81.1 R54.1 U27.4
SDA27: JP84.1 R56.1 U28.4
SDA28: JP87.1 R58.1 U29.4
SDA29: JP90.1 R60.1 U30.4
SDA30: JP93.1 R62.1 U31.4
SDA31: JP96.1 R64.1 U32.4
SDA32: JP99.1 R66.1 U33.4
SDA33: JP102.1 R68.1 U34.4
SDA34: JP105.1 R70.1 U35.4
SDA35: JP108.1 R72.1 U36.4
VCC: C2.1 JP1.5 R1.2 R2.2 U1.8
VCC1: C4.1 JP6.5 R3.2 R4.2 U2.8
VCC2: C6.1 JP9.5 R5.2 R6.2 U3.8
VCC3: C8.1 JP12.5 R7.2 R8.2 U4.8
VCC4: C10.1 JP15.5 R9.2 R10.2 U5.8
VCC5: C12.1 JP18.5 R11.2 R12.2 U6.8
VCC6: C14.1 JP21.5 R13.2 R14.2 U7.8
VCC7: C16.1 JP24.5 R15.2 R16.2 U8.8
VCC8: C18.1 JP27.5 R17.2 R18.2 U9.8
VCC9: C20.1 JP30.5 R19.2 R20.2 U10.8
VCC10: C22.1 JP33.5 R21.2 R22.2 U11.8
VCC11: C24.1 JP36.5 R23.2 R24.2 U12.8
VCC12: C26.1 JP39.5 R25.2 R26.2 U13.8
VCC13: C28.1 JP42.5 R27.2 R28.2 U14.8
VCC14: C30.1 JP45.5 R29.2 R30.2 U15.8
VCC15: C32.1 JP48.5 R31.2 R32.2 U16.8
VCC16: C34.1 JP51.5 R33.2 R34.2 U17.8
VCC17: C36.1 JP54.5 R35.2 R36.2 U18.8
VCC18: C38.1 JP57.5 R37.2 R38.2 U19.8
VCC19: C40.1 JP60.5 R39.2 R40.2 U20.8
VCC20: C42.1 JP63.5 R41.2 R42.2 U21.8
VCC21: C44.1 JP66.5 R43.2 R44.2 U22.8
VCC22: C46.1 JP69.5 R45.2 R46.2 U23.8
VCC23: C48.1 JP72.5 R47.2 R48.2 U24.8
VCC24: C50.1 JP75.5 R49.2 R50.2 U25.8
VCC25: C52.1 JP78.5 R51.2 R52.2 U26.8
VCC26: C54.1 JP81.5 R53.2 R54.2 U27.8
VCC27: C56.1 JP84.5 R55.2 R56.2 U28.8
VCC28: C58.1 JP87.5 R57.2 R58.2 U29.8
VCC29: C60.1 JP90.5 R59.2 R60.2 U30.8
VCC30: C62.1 JP93.5 R61.2 R62.2 U31.8
VCC31: C64.1 JP96.5 R63.2 R64.2 U32.8
VCC32: C66.1 JP99.5 R65.2 R66.2 U33.8
VCC33: C68.1 JP102.5 R67.2 R68.2 U34.8
VCC34: C70.1 JP105.5 R69.2 R70.2 U35.8
VCC35: C72.1 JP108.5 R71.2 R72.2 U36.8